# Altium PCB Carte_GR_2017.PcbDoc (part 2 of 2)
Units mil, origin at the board's own origin, x right, y up, seen from the top; angles counter-clockwise.
Board outline 6500 x 3500 mil, 2 copper layers (Top Layer, Bottom Layer); 159 components, 151 nets, 592 pads, 138 vias.
Unrouted connection lines stored in the file: 4.
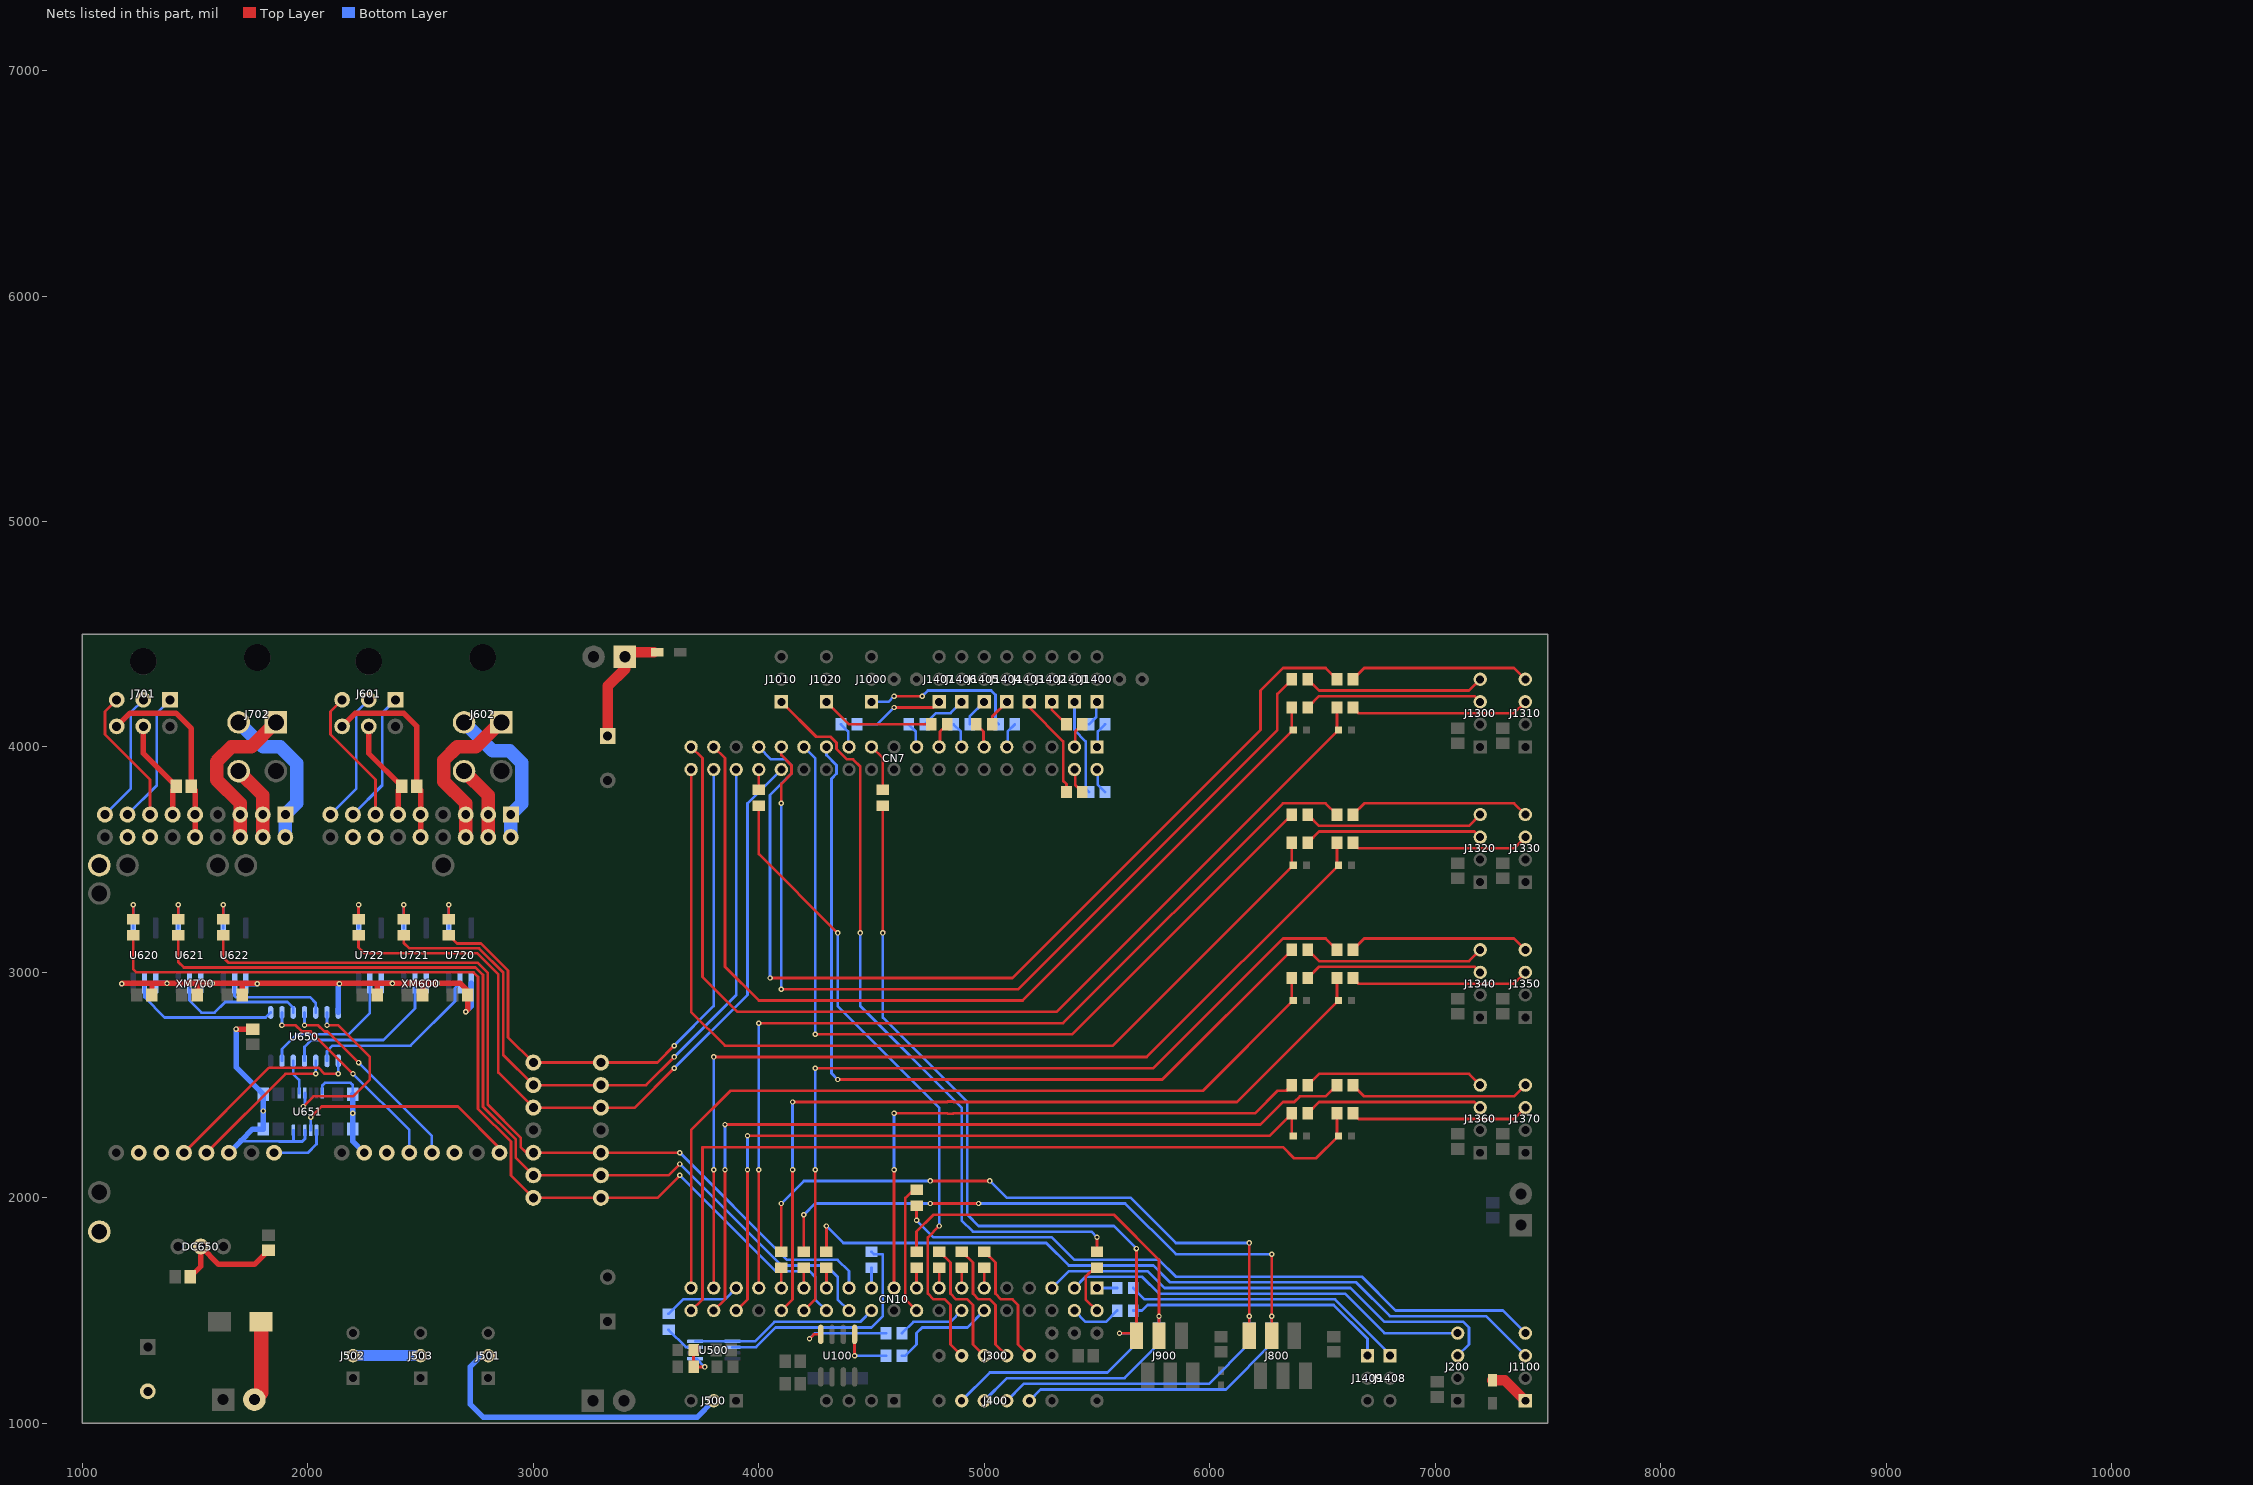
[diagram p2: the nets of this part, all layers, seen from the top]

## Via types
v1: diameter 24, hole 12, Top Layer to Bottom Layer, 131 vias
v2: diameter 140, hole 120, Top Layer to Bottom Layer, 6 vias
v3: diameter 50, hole 28, Top Layer to Bottom Layer, 1 vias

## Nets (pads, with @x,y where several pads share a name; then routed paths per layer and width w, separated by ;. In a path a pad name is that pad's centre, name@x,y a point inside that pad or via, vN(x,y) a via of type N, cw(c..) or ccw(c..) an arc to the next point about the centre after c; other vN are vias at no path point) (continued)
GND_PWR: B1.2 C1.2 C600.1 C620.1 C621.1 C622.1 C650.1 C651.1 C652.1 C653.1 C654.1 C655.1 C656.1 C700.1 C720.1 C721.1 C722.1 DC650.2 J601.6 J701.6 pad.12 pad.13 U620.4 U621.4 U622.4 U650.7 U651.4 U651.6 U651.12 U720.4 U721.4 U722.4 XM600.9 XM600.10 XM600.14 XM600.16 XM600.20 XM600.21 XM600.24 XM700.9 XM700.10 XM700.14 XM700.16 XM700.20 XM700.21 XM700.24 Z1.1 | length 6678.7
  Top Layer w24: J701.6@1151.89,4090.94 1210.94,4150 1415,4150 1483.46,4081.54 C700.1@1483.46,3825 1500,3808.46 XM700.9@1500,3700 XM700.10@1500,3600 ; v1(1175,2950) 1176.03,2951.03 1305,2951.03 ; C620.1@1308.46,2900 1308.46,2947.56 1305,2951.03 ; C650.1@1478.46,1650 1525,1696.54 DC650.2@1525,1784.13 1604.13,1705 1763.46,1705 C651.1@1825,1766.54 ; C621.1@1508.46,2900 1508.46,2949.49 1510,2951.03 ; v1(1681.54,2748.46) C656.1@1755,2748.46 ; C622.1@1708.46,2900 1708.46,2949.49 1710,2951.03 ; J601.6@2151.89,4090.94 2210.94,4150 2425,4150 2483.46,4091.54 C600.1@2483.46,3825 2500,3808.46 XM600.9@2500,3700 XM600.10@2500,3600 ; C722.1@2308.46,2900 2308.46,2949.49 ; C721.1@2510,2901.54 2510,2951.03 ; v1(2700,2825) 2708.46,2833.46 C720.1@2708.46,2900 2708.46,2918.59 2676.03,2951.03 v1(2575,2951.03) 2510,2951.03 ; 1305,2951.03 v1(1375,2951.03) 1510,2951.03 ; 1510,2951.03 v1(1575,2951.03) 1710,2951.03 ; 1710,2951.03 v1(2375,2951.03) 2510,2951.03
  Top Layer w64: B1.2@1762.8,1105 1792.52,1134.72 Z1.1@1792.52,1450
  Bottom Layer w12: 1702.5,2252.5 1704.07,2250.93 1871.1,2250.93 1872.03,2250 1935,2250 ; U651.6@1935.91,2299.65 1935.91,2250.91 1935,2250 ; U651.4@1987.09,2299.65 1987.09,2262.09 1975,2250 1935,2250 ; U651.12@2063.86,2465 2063.86,2498.86 2075,2510 2190,2510 2198.46,2501.54 C655.1@2198.46,2460
  Bottom Layer w24: U620.4@1325,2952.95 1326.93,2951.03 v1(1375,2951.03) ; U621.4@1525,2952.95 1526.93,2951.03 v1(1575,2951.03) ; XM700.24@1650,2200 1702.5,2252.5 1755,2305 C653.1@1801.54,2305 v1(1801.54,2385) C654.1@1801.54,2460 1681.54,2580 v1(1681.54,2748.46) ; U622.4@1725,2952.95 1727.95,2950 v1(1775,2950) ; U650.7@2135,2822.28 2135,2945 v1(2140,2950) ; C655.1@2198.46,2460 C652.1@2198.46,2305 2198.46,2251.54 XM600.20@2250,2200 ; U722.4@2326.93,2951.03 v1(2375,2951.03) ; U721.4@2525,2952.95 2526.93,2951.03 v1(2575,2951.03) ; v1(2700,2825) 2725,2850 U720.4@2725,2952.95
  other v1: 2198.46,2375
M1_H1: J601.5 XM600.13 | length 613.4
  Top Layer w12: J601.5@2151.89,4209.06 2100,4157.17 2100,4055 2300,3855 XM600.13@2300,3700
M1_H2: J601.1 XM600.15 | length 587
  Bottom Layer w12: XM600.15@2200,3700 2330,3830 2330,4150.94 J601.1@2388.11,4209.06
M1_H3: J601.3 XM600.17 | length 579.5
  Bottom Layer w12: XM600.17@2100,3700 2215,3815 2215,4154.06 J601.3@2270,4209.06
M1_VCC_H: C600.2 J601.4 XM600.11 | length 458.5
  Top Layer w24: J601.4@2270,4090.94 2270,3971.54 C600.2@2416.54,3825 2400,3808.46 XM600.11@2400,3700
M1_W1: J602.3 XM600.1 XM600.2 | length 678.5
  Bottom Layer w60: J602.3@2692.76,4109.06 2819.79,3982.02 2895.18,3982.02 2947.61,3929.59 2947.61,3747.61 XM600.1@2900,3700 XM600.2@2900,3600
M1_W2: J602.4 XM600.3 XM600.4 | length 336.9
  Top Layer w60: J602.4@2692.76,3892.52 2800,3785.28 XM600.3@2800,3700 XM600.4@2800,3600
M1_W3: J602.1 XM600.5 XM600.6 | length 705.7
  Top Layer w60: XM600.6@2700,3600 XM600.5@2700,3700 2700,3749.87 2603.26,3846.61 2603.26,3941.34 2661.92,4000 2745,4000 2854.06,4109.06 J602.1@2858.11,4109.06
M2_H1: J701.5 XM700.13 | length 613.4
  Top Layer w12: J701.5@1151.89,4209.06 1100,4157.17 1100,4055 1300,3855 XM700.13@1300,3700
M2_H2: J701.1 XM700.15 | length 587
  Bottom Layer w12: XM700.15@1200,3700 1330,3830 1330,4150.94 J701.1@1388.11,4209.06
M2_H3: J701.3 XM700.17 | length 579.5
  Bottom Layer w12: XM700.17@1100,3700 1215,3815 1215,4154.06 J701.3@1270,4209.06
M2_VCC_H: C700.2 J701.4 XM700.11 | length 458.5
  Top Layer w24: J701.4@1270,4090.94 1270,3971.54 C700.2@1416.54,3825 1400,3808.46 XM700.11@1400,3700
M2_W1: J702.3 XM700.1 XM700.2 | length 680.5
  Bottom Layer w60: J702.3@1692.76,4109.06 1801.81,4000 1877.2,4000 1950,3927.2 1950,3750 XM700.1@1900,3700 XM700.2@1900,3600
M2_W2: J702.4 XM700.3 XM700.4 | length 336.9
  Top Layer w60: J702.4@1692.76,3892.52 1800,3785.28 XM700.3@1800,3700 XM700.4@1800,3600
M2_W3: J702.1 XM700.5 XM700.6 | length 713.7
  Top Layer w60: XM700.6@1700,3600 XM700.5@1700,3700 1700,3749.87 1595,3854.87 1595,3935 1660,4000 1749.06,4000 J702.1@1858.11,4109.06
MAXON1_DIR: U650.4 XM600.23 | length 900.2
  Top Layer w12: v1(1985,2765) 2046.11,2765 2073.61,2737.5 2087.5,2737.5 v1(2225,2600)
  Bottom Layer w12: v1(1985,2765) U650.4@1985,2822.28 ; v1(2225,2600) 2550,2275 XM600.23@2550,2200
MAXON1_DIR_INV: U621.5 U650.3 | length 611.5
  Bottom Layer w12: U621.5@1475,2952.95 1475,2875 1528.53,2821.47 1586.39,2821.47 1633.63,2868.71 1910,2868.71 1935,2843.71 U650.3@1935,2822.28
MAXON1_EN: U650.2 XM600.22 | length 914.9
  Top Layer w12: v1(1885,2765) 1946.11,2765 1973.61,2737.5 2012.5,2737.5 v1(2200,2550)
  Bottom Layer w12: v1(1885,2765) U650.2@1885,2822.28 ; v1(2200,2550) 2450,2300 XM600.22@2450,2200
MAXON1_EN_INV: U620.5 U650.1 | length 669.5
  Bottom Layer w12: U620.5@1275,2952.95 1275,2890 1365.03,2799.97 1812.69,2799.97 U650.1@1835,2822.28
MAXON1_PWM: U650.6 U651.9 | length 802.9
  Top Layer w12: v1(1980,2405) 2025,2450 2200,2450 2275,2525 2275,2625 2135,2765 v1(2085,2765)
  Bottom Layer w12: v1@1987.09,2412.09 U651.9@1987.09,2465 ; v1(2085,2765) U650.6@2085,2822.28
MAXON1_PWM_INV: U622.5 U650.5 | length 473.1
  Bottom Layer w12: U622.5@1675,2952.95 1675,2895 1679.79,2890.21 2009.79,2890.21 2035,2865 U650.5@2035,2822.28
MAXON1_V_CMD: U651.3 XM600.26 | length 1011.6
  Top Layer w12: v1(2012.68,2357.68) 2060,2405 2665,2405 2850,2220 XM600.26@2850,2200
  Bottom Layer w12: U651.3@2012.68,2299.65 v1(2012.68,2357.68)
MAXON2_DIR: U650.10 XM700.23 | length 687.7
  Top Layer w12: XM700.23@1550,2200 1900,2550 v1(2035,2550)
  Bottom Layer w12: v1(2035,2550) U650.10@2035,2607.72
MAXON2_DIR_INV: U650.11 U721.5 | length 735.7
  Bottom Layer w12: U650.11@1985,2607.72 1985,2670 2015,2700 2335,2700 2475,2840 U721.5@2475,2952.95
MAXON2_EN: U650.8 XM700.22 | length 910.5
  Top Layer w12: XM700.22@1450,2200 1827.5,2577.5 2046.39,2577.5 2073.89,2550 v1(2135,2550)
  Bottom Layer w12: v1(2135,2550) U650.8@2135,2607.72
MAXON2_EN_INV: U650.9 U720.5 | length 792
  Bottom Layer w12: U650.9@2085,2607.72 2085,2650 2110,2675 2455.43,2675 2652.5,2872.07 2652.5,2930.45 U720.5@2675,2952.95
MAXON2_PWM: U650.12 U651.8 | length 153.7
  Bottom Layer w12: U650.12@1935,2607.72 1935,2550 1961.5,2523.5 U651.8@1961.5,2465
MAXON2_PWM_INV: U650.13 U722.5 | length 641.5
  Bottom Layer w12: U650.13@1885,2607.72 1885,2660 1950,2725 2180,2725 2275,2820 U722.5@2275,2952.95
MAXON2_V_CMD: U651.2 XM700.26 | length 265.5
  Bottom Layer w12: XM700.26@1850,2200 2000,2200 2038.27,2238.27 U651.2@2038.27,2299.65
NetB2_1: B2.1 C2.1 FB2.2 | length 519.2
  Top Layer w48: C2.1@3330,4048.43 3330,4270 3406,4346 B2.1@3406,4400 3426,4420 FB2.2@3533.82,4420
NetFB1100_2: FB1100.2 J1100.1 | length 182.8
  Top Layer w48: FB1100.2@7255,1191.18 7308.82,1191.18 J1100.1@7400,1100
NetJ300_2: J300.2 R303.1 | length 2883.1
  Top Layer w12: R303.1@4000,3739.57 4000,3525 v1(4350,3175) ; v1(4800,1875) 4750,1825 4750,1575 4775,1550 4825,1550 4850,1525 4850,1350 J300.2@4900,1300
  Bottom Layer w12: v1(4350,3175) 4350,2850 4800,2400 v1(4800,1875)
NetJ300_3: J300.3 R302.1 | length 573.9
  Top Layer w12: R302.1@4800,1760.43 4802.24,1760.43 4850,1712.67 4850,1575 4875,1550 4925,1550 4950,1525 4950,1350 J300.3@5000,1300
NetJ300_4: J300.4 R301.1 | length 573.9
  Top Layer w12: R301.1@4900,1760.43 4902.24,1760.43 4950,1712.67 4950,1575 4975,1550 5025,1550 5050,1525 5050,1350 J300.4@5100,1300
NetJ300_5: J300.5 R300.1 | length 573.9
  Top Layer w12: R300.1@5000,1760.43 5002.24,1760.43 5050,1712.67 5050,1575 5075,1550 5125,1550 5150,1525 5150,1350 J300.5@5200,1300
NetJ400_2: J400.2 R400.1 | length 1179.9
  Bottom Layer w12: J400.2@5200,1100 5250,1150 6071.85,1150 R400.1@6275,1353.15
NetJ400_3: J400.3 R401.1 | length 1179.9
  Bottom Layer w12: J400.3@5100,1100 5175,1175 5996.85,1175 R401.1@6175,1353.15
NetJ400_4: J400.4 R402.1 | length 879.9
  Bottom Layer w12: J400.4@5000,1100 5100,1200 5621.85,1200 R402.1@5775,1353.15
NetJ400_5: J400.5 R403.1 | length 879.9
  Bottom Layer w12: J400.5@4900,1100 5025,1225 5546.85,1225 R403.1@5675,1353.15
NetJ1000_1: J1000.1 R1000.2 | length 715.6
  Top Layer w12: v1(4600,4225) v1(4725,4225)
  Bottom Layer w12: J1000.1@4500,4200 4575,4200 v1(4600,4225) ; v1(4725,4225) 4750,4250 5030.98,4250 5050,4230.98 5050,4114.57 R1000.2@5064.57,4100
NetJ1010_1: J1010.1 R1010.2 | length 3380.3
  Top Layer w12: J1010.1@4100,4200 4254.97,4045.03 4318.65,4045.03 4345.03,4018.65 4345.03,3991.29 4391.29,3945.03 4418.65,3945.03 4450,3913.68 v1(4450,3175) ; R1010.2@5500,1760.43 v1(5500,1825)
  Bottom Layer w12: v1(4450,3175) 4450,2850 4900,2400 4900,1900 4950,1850 5475,1850 v1(5500,1825)
NetJ1020_1: J1020.1 R1020.2 | length 506
  Top Layer w12: J1020.1@4300,4200 4400,4100 R1020.2@4764.57,4100
NetJ1100_3: J1100.3 R1100.1 | length 3452.7
  Top Layer w12: R1100.1@4300,1760.43 v1(4300,1875)
  Bottom Layer w12: v1(4300,1875) 4375,1800 5275,1800 5375,1700 5750,1700 5825,1625 6650,1625 6800,1475 7225,1475 J1100.3@7400,1300
NetJ1100_4: J1100.4 R1101.1 | length 2971.7
  Top Layer w12: v1(4700,1900) R1101.1@4700,1964.57
  Bottom Layer w12: v1(4700,1900) 4775,1825 5300,1825 5400,1725 5775,1725 5850,1650 6675,1650 6825,1500 7300,1500 J1100.4@7400,1400
NetJ1300_3: J1300.3 R1300.1 | length 795.6
  Top Layer w12: R1300.1@6435.43,4175 6485.43,4225 7175,4225 J1300.3@7200,4200
NetJ1300_4: J1300.4 R1301.1 | length 806
  Top Layer w12: R1301.1@6435.43,4300 6485.43,4250 7150,4250 J1300.4@7200,4300
NetJ1310_3: J1310.3 R1310.1 | length 795.6
  Top Layer w12: R1310.1@6635.43,4175 6660.43,4150 7350,4150 J1310.3@7400,4200
NetJ1310_4: J1310.4 R1311.1 | length 806
  Top Layer w12: R1311.1@6635.43,4300 6685.43,4350 7350,4350 J1310.4@7400,4300
NetJ1320_3: J1320.3 R1320.1 | length 795.6
  Top Layer w12: R1320.1@6435.43,3575 6485.43,3625 7175,3625 J1320.3@7200,3600
NetJ1320_4: J1320.4 R1321.1 | length 806
  Top Layer w12: R1321.1@6435.43,3700 6485.43,3650 7150,3650 J1320.4@7200,3700
NetJ1330_3: J1330.3 R1330.1 | length 795.6
  Top Layer w12: R1330.1@6635.43,3575 6660.43,3550 7350,3550 J1330.3@7400,3600
NetJ1330_4: J1330.4 R1331.1 | length 806
  Top Layer w12: R1331.1@6635.43,3700 6685.43,3750 7350,3750 J1330.4@7400,3700
NetJ1340_3: J1340.3 R1340.1 | length 795.6
  Top Layer w12: R1340.1@6435.43,2975 6485.43,3025 7175,3025 J1340.3@7200,3000
NetJ1340_4: J1340.4 R1341.1 | length 806
  Top Layer w12: R1341.1@6435.43,3100 6485.43,3050 7150,3050 J1340.4@7200,3100
NetJ1350_3: J1350.3 R1350.1 | length 795.6
  Top Layer w12: R1350.1@6635.43,2975 6660.43,2950 7350,2950 J1350.3@7400,3000
NetJ1350_4: J1350.4 R1351.1 | length 806
  Top Layer w12: R1351.1@6635.43,3100 6685.43,3150 7350,3150 J1350.4@7400,3100
NetJ1360_3: J1360.3 R1360.1 | length 795.6
  Top Layer w12: R1360.1@6435.43,2375 6485.43,2425 7175,2425 J1360.3@7200,2400
NetJ1360_4: J1360.4 R1361.1 | length 806
  Top Layer w12: R1361.1@6435.43,2500 6485.43,2550 7150,2550 J1360.4@7200,2500
NetJ1370_3: J1370.3 R1370.1 | length 795.6
  Top Layer w12: R1370.1@6635.43,2375 6660.43,2350 7350,2350 J1370.3@7400,2400
NetJ1370_4: J1370.4 R1371.1 | length 806
  Top Layer w12: R1371.1@6635.43,2500 6685.43,2450 7350,2450 J1370.4@7400,2500
NetJ1400_1: J1400.1 R1400.2 | length 116.8
  Bottom Layer w12: R1400.2@5464.57,4100 5496.31,4131.74 5496.31,4200 J1400.1@5500,4200
NetJ1401_1: J1401.1 R1401.2 | length 426.7
  Bottom Layer w12: J1401.1@5400,4200 5400,4075 5450,4025 5450,3814.57 R1401.2@5464.57,3800
NetJ1402_1: J1402.1 R1402.2 | length 126.7
  Top Layer w12: J1402.1@5300,4200 5300,4164.57 R1402.2@5364.57,4100
NetJ1403_1: J1403.1 R1403.2 | length 468.2
  Top Layer w12: J1403.1@5200,4200 5200,4175 5350,4025 5350,3850 5364.57,3835.43 R1403.2@5364.57,3800
NetJ1404_1: J1404.1 R1404.2 | length 126.7
  Top Layer w12: R1404.2@5035.43,4100 5035.43,4135.43 J1404.1@5100,4200
NetJ1405_1: J1405.1 R1405.2 | length 126.7
  Bottom Layer w12: R1405.2@4935.43,4100 4935.43,4135.43 J1405.1@5000,4200
NetJ1406_1: J1406.1 R1406.2 | length 206
  Bottom Layer w12: R1406.2@4735.43,4100 4785.43,4150 4850,4150 J1406.1@4900,4200
NetJ1407_1: J1407.1 R1407.2 | length 406
  Top Layer w12: v1(4600,4175) 4775,4175 J1407.1@4800,4200
  Bottom Layer w12: R1407.2@4435.43,4100 4525,4100 v1(4600,4175)
NetJ1408_1: J1408.1 R1408.2 | length 1267
  Bottom Layer w12: R1408.2@5660.43,1600 5710.43,1550 6555.41,1550 6800,1305.41 J1408.1@6800,1300
NetJ1409_1: J1409.1 R1409.2 | length 1187.1
  Bottom Layer w12: R1409.2@5660.43,1500 5700,1500 5725,1525 6550,1525 6700,1375 J1409.1@6700,1300
NetR103_1: R103.1 U100.1 | length 234.1
  Top Layer w12: v1(4425,1300) U100.1@4425,1394.49
  Bottom Layer w12: v1(4425,1300) R103.1@4564.57,1300
NetR104_1: R104.1 U100.4 | length 408
  Top Layer w12: v1(4225,1375) 4244.49,1394.49 U100.4@4275,1394.49
  Bottom Layer w12: v1(4225,1375) 4250,1400 R104.1@4564.57,1400
NetR500_1: R500.1 R501.2 U500.1 | length 181.5
  Top Layer w12: R500.1@3710.87,1325 R501.2@3710.87,1250 v1(3760,1250)
  Bottom Layer w12: U500.1@3717.76,1286.61 3723.39,1286.61 v1(3760,1250)
NetR503_1: R503.1 U500.6 | length 1053
  Bottom Layer w12: U500.6@3883.11,1337.8 3987.8,1337.8 4075,1425 4500,1425 4550,1475 4550,1750 4510.43,1750 R503.1@4500,1760.43
NetR504_1: R504.1 U500.3 | length 149.6
  Bottom Layer w12: R504.1@3600,1414.57 3676.77,1337.8 U500.3@3717.76,1337.8
NetR620_2: R620.2 U620.1 | length 167.5
  Top Layer w12: R620.2@1225,3235.43 v1(1225,3300)
  Bottom Layer w12: U620.1@1225,3197.05 v1(1225,3300)
NetR621_2: R621.2 U621.1 | length 167.5
  Top Layer w12: R621.2@1425,3235.43 v1(1425,3300)
  Bottom Layer w12: U621.1@1425,3197.05 v1(1425,3300)
NetR622_2: R622.2 U622.1 | length 167.5
  Top Layer w12: R622.2@1625,3235.43 v1(1625,3300)
  Bottom Layer w12: U622.1@1625,3197.05 v1(1625,3300)
NetR720_2: R720.2 U720.1 | length 167.5
  Top Layer w12: R720.2@2625,3235.43 v1(2625,3300)
  Bottom Layer w12: U720.1@2625,3197.05 v1(2625,3300)
NetR721_2: R721.2 U721.1 | length 167.5
  Top Layer w12: R721.2@2425,3235.43 v1(2425,3300)
  Bottom Layer w12: U721.1@2425,3197.05 v1(2425,3300)
NetR722_2: R722.2 U722.1 | length 167.5
  Top Layer w12: R722.2@2225,3235.43 v1(2225,3300)
  Bottom Layer w12: U722.1@2225,3197.05 v1(2225,3300)
QEI1_CH_A: J800.4 R400.2 R800.1 | length 2765.9
  Top Layer w12: R800.1@4200,1760.43 v1(4200,1925) ; v1(4760,1975) v1(4975,1975) ; J800.4@6275,1388.58 v1(6275,1475) v1(6275,1750)
  Bottom Layer w12: v1(4200,1925) 4250,1975 v1(4760,1975) ; v1(4975,1975) 5625,1975 5850,1750 v1(6275,1750) ; R400.2@6275,1424.02 v1(6275,1475)
QEI1_CH_B: J800.6 R401.2 R801.1 | length 2907.3
  Top Layer w12: R801.1@4100,1760.43 v1(4100,1975) ; v1(4760,2075) v1(5025,2075) ; J800.6@6175,1388.58 v1(6175,1475) v1(6175,1800)
  Bottom Layer w12: v1(4100,1975) 4200,2075 v1(4760,2075) ; v1(5025,2075) 5100,2000 5650,2000 5850,1800 v1(6175,1800) ; R401.2@6175,1424.02 v1(6175,1475)
QEI2_CH_A: J900.4 R402.2 R900.1 | length 1665.9
  Top Layer w12: R900.1@4700,1760.43 4700,1850 4775,1925 5575,1925 5775,1725 v1(5775,1475) J900.4@5775,1388.58
  Bottom Layer w12: R402.2@5775,1424.02 v1(5775,1475)
QEI2_CH_B: J900.6 R403.2 R901.1 | length 3337.3
  Top Layer w12: v1(4550,3175) 4555,3180 4550,3185 R901.1@4550,3739.57 ; v1(5600,1400) 5663.58,1400 J900.6@5675,1388.58 v1(5675,1775)
  Bottom Layer w12: v1(4550,3175) 4550,2800 4925,2425 4925,1925 4975,1875 5575,1875 v1(5675,1775) ; v1(5600,1400) 5650.98,1400 R403.2@5675,1424.02
STM32_PA1_MAXON2_PWM: CN7.30 pad.14@3000,2400 pad.14@3300,2400 R722.1 | length 3597.7
  Top Layer w12: R722.1@2225,3164.57 2225,3110 2250,3085 2750,3085 2845,2990 2845,2555 pad.14@3000,2400 pad.14@3300,2400 3450,2400 v1(3625,2575)
  Bottom Layer w12: v1(3625,2575) 3950,2900 3950,3750 CN7.30@4100,3900
STM32_PA4_SPI1_NSS: CN7.32 R303.2 | length 89.6
  Top Layer w12: R303.2@4000,3810.43 CN7.32@4000,3900
STM32_PA5_SPI1_SCK: CN10.11 R300.2 | length 89.6
  Top Layer w12: CN10.11@5000,1600 R300.2@5000,1689.57
STM32_PA6_SPI1_MISO: CN10.13 R301.2 | length 89.6
  Top Layer w12: CN10.13@4900,1600 R301.2@4900,1689.57
STM32_PA7_SPI1_MOSI: CN10.15 R302.2 | length 89.6
  Top Layer w12: CN10.15@4800,1600 R302.2@4800,1689.57
STM32_PA8_MAXON1_PWM: CN10.23 pad.14@3000,2200 pad.14@3300,2200 R622.1 | length 3891.9
  Top Layer w12: R622.1@1625,3164.57 1625,3065 1646.97,3043.03 2752.78,3043.03 2798,2997.81 2798,2412.81 2943.93,2266.88 2943.93,2226.07 2970,2200 pad.14@3000,2200 pad.14@3300,2200 v1(3650,2200)
  Bottom Layer w12: v1(3650,2200) 4125,1725 4350,1725 4400,1675 CN10.23@4400,1600
STM32_PA9_MAX485_TX: CN10.21 R503.2 | length 89.6
  Bottom Layer w12: CN10.21@4500,1600 R503.2@4500,1689.57
STM32_PA10_MAX485_RX: CN10.33 R504.2 | length 347.5
  Bottom Layer w12: R504.2@3600,1485.43 3664.57,1550 3850,1550 CN10.33@3900,1600
STM32_PA11_CAN1_RX: CN10.14 R104.2 | length 306
  Bottom Layer w12: R104.2@4635.43,1400 4685.43,1450 4850,1450 CN10.14@4900,1500
STM32_PA12_CAN1_TX: CN10.12 R103.2 | length 476.7
  Bottom Layer w12: R103.2@4635.43,1300 4650,1300 4700,1350 4700,1400 4725,1425 4925,1425 CN10.12@5000,1500
STM32_PA13_GPIO: CN7.13 R1405.1 | length 114.7
  Bottom Layer w12: R1405.1@4864.57,4100 4896.31,4068.26 4896.31,4003.69 CN7.13@4900,4000
STM32_PA14_SERVO12_PWM: CN7.15 R1020.1 | length 114.7
  Top Layer w12: CN7.15@4800,4000 4803.69,4003.69 4803.69,4068.26 R1020.1@4835.43,4100
STM32_PA15_GPIO: CN7.17 R1406.1 | length 114.7
  Bottom Layer w12: R1406.1@4664.57,4100 4696.31,4068.26 4696.31,4003.69 CN7.17@4700,4000
STM32_PB0_MAXON2_DIR: CN7.34 pad.14@3000,2500 pad.14@3300,2500 R721.1 | length 3149.4
  Top Layer w12: R721.1@2425,3164.57 2425,3131.5 2450,3106.5 2758.91,3106.5 2866.5,2998.91 2866.5,2633.5 pad.14@3000,2500 pad.14@3300,2500 3500,2500 v1(3625,2625)
  Bottom Layer w12: v1(3625,2625) 3900,2900 CN7.34@3900,3900
STM32_PB1_MAXON1_DIR: CN10.24 pad.14@3000,2100 pad.14@3300,2100 R621.1 | length 4223.4
  Top Layer w12: R621.1@1425,3164.57 1425,3046.53 1450,3021.53 2743.88,3021.53 2776.5,2988.91 2776.5,2403.91 2922.43,2257.97 2922.43,2177.57 pad.14@3000,2100 pad.14@3300,2100 3600,2100 v1(3650,2150)
  Bottom Layer w12: v1(3650,2150) 4100,1700 4300,1700 4350,1650 4350,1550 CN10.24@4400,1500
STM32_PB2_MAX485_DIR: CN10.22 U500.4 U500.5 | length 838.8
  Bottom Layer w12: U500.4@3717.76,1363.39 U500.5@3883.11,1363.39 3982.98,1363.39 4069.59,1450 4450,1450 CN10.22@4500,1500
STM32_PB4_QEI1_CH_A: CN10.27 R800.2 | length 89.6
  Top Layer w12: CN10.27@4200,1600 R800.2@4200,1689.57
STM32_PB5_QEI1_CH_B: CN10.29 R801.2 | length 89.6
  Top Layer w12: CN10.29@4100,1600 R801.2@4100,1689.57
STM32_PB6_QEI2_CH_A: CN10.17 R900.2 | length 89.6
  Top Layer w12: CN10.17@4700,1600 R900.2@4700,1689.57
STM32_PB7_QEI2_CH_B: CN7.21 R901.2 | length 210.3
  Top Layer w12: CN7.21@4500,4000 4550,3950 R901.2@4550,3810.43
STM32_PB8_I2C1_SCL: CN10.3 J200.4 | length 1824.3
  Bottom Layer w12: CN10.3@5400,1600 5450,1650 5700,1650 5775,1575 6600,1575 6775,1400 J200.4@7100,1400
STM32_PB9_I2C1_SDA: CN10.5 J200.3 | length 2130.3
  Bottom Layer w12: CN10.5@5300,1600 5375,1675 5725,1675 5800,1600 6625,1600 6775,1450 7125,1450 7150,1425 7150,1350 J200.3@7100,1300
STM32_PB10_RPI_TX: CN10.25 R1100.2 | length 89.6
  Top Layer w12: CN10.25@4300,1600 R1100.2@4300,1689.57
STM32_PB11_RPI_RX: CN10.18 R1101.2 | length 585.4
  Top Layer w12: CN10.18@4700,1500 4650,1550 4650,2000 4685.43,2035.43 R1101.2@4700,2035.43
STM32_PB15_MAXON1_EN: CN10.26 pad.14@3000,2000 pad.14@3300,2000 R620.1 | length 4424.3
  Top Layer w12: R620.1@1225,3164.57 1225,3015 1239.97,3000.03 2734.97,3000.03 2755,2980 2755,2394.59 2900.53,2249.07 2900.93,2249.07 2900.93,2099.07 pad.14@3000,2000 pad.14@3300,2000 3550,2000 v1(3650,2100)
  Bottom Layer w12: v1(3650,2100) 4075,1675 4225,1675 4250,1650 4250,1550 CN10.26@4300,1500
STM32_PC1_MAXON2_EN: CN7.36 pad.14@3000,2600 pad.14@3300,2600 R720.1 | length 2735.7
  Top Layer w12: R720.1@2625,3164.57 2661.57,3128 2767.81,3128 2888,3007.81 2888,2712 pad.14@3000,2600 pad.14@3300,2600 3550,2600 v1(3625,2675)
  Bottom Layer w12: v1(3625,2675) 3800,2850 CN7.36@3800,3900
STM32_PC6_GPIO: CN10.4 R1409.1 | length 231
  Bottom Layer w12: CN10.4@5400,1500 5450,1450 5539.57,1450 R1409.1@5589.57,1500
STM32_PC8_SERVO11_PWM: CN10.2 R1010.1 | length 237.1
  Top Layer w12: CN10.2@5500,1500 5450,1550 5450,1650 5489.57,1689.57 R1010.1@5500,1689.57
STM32_PC9_GPIO: CN10.1 R1408.1 | length 89.6
  Bottom Layer w12: CN10.1@5500,1600 R1408.1@5589.57,1600
STM32_PC10_GPIO: CN7.1 R1400.1 | length 114.7
  Bottom Layer w12: CN7.1@5500,4000 5503.69,4003.69 5503.69,4068.26 R1400.1@5535.43,4100
STM32_PC11_GPIO: CN7.2 R1401.1 | length 114.7
  Bottom Layer w12: CN7.2@5500,3900 5503.69,3896.31 5503.69,3831.74 R1401.1@5535.43,3800
STM32_PC12_GPIO: CN7.3 R1402.1 | length 114.7
  Top Layer w12: CN7.3@5400,4000 5403.69,4003.69 5403.69,4068.26 R1402.1@5435.43,4100
STM32_PC13_GPIO: CN7.23 R1407.1 | length 114.7
  Bottom Layer w12: R1407.1@4364.57,4100 4396.31,4068.26 4396.31,4003.69 CN7.23@4400,4000
STM32_PD2_GPIO: CN7.4 R1403.1 | length 114.7
  Top Layer w12: CN7.4@5400,3900 5403.69,3896.31 5403.69,3831.74 R1403.1@5435.43,3800
STM32_PF6_SERVO10_PWM: CN7.9 R1000.1 | length 114.7
  Bottom Layer w12: CN7.9@5100,4000 5103.69,4003.69 5103.69,4068.26 R1000.1@5135.43,4100
STM32_PF7_GPIO: CN7.11 R1404.1 | length 114.7
  Top Layer w12: R1404.1@4964.57,4100 4996.31,4068.26 4996.31,4003.69 CN7.11@5000,4000
STM32_SHARP0_ADC: C1301.2 CN7.35 R1300.2 | length 4177.8
  Top Layer w12: CN7.35@3800,4000 3850,3950 3850,3025 4000,2875 5170.47,2875 C1301.2@6370.47,4075 6364.57,4080.91 R1300.2@6364.57,4175
STM32_SHARP0_GPIO: CN7.29 R1301.2 | length 4040.4
  Top Layer w12: v1(4100,2925) 5150,2925 6300,4075 6300,4235.43 R1301.2@6364.57,4300 ; v1(4100,3750) 4100,3836.32 4145.03,3881.35 4145.03,3918.65 4100,3963.68 CN7.29@4100,4000
  Bottom Layer w12: v1(4100,2925) v1(4100,3750)
STM32_SHARP1_ADC: C1311.2 CN7.37 R1310.2 | length 4545.6
  Top Layer w12: CN7.37@3700,4000 3750,3950 3750,2980 3905,2825 5320.47,2825 C1311.2@6570.47,4075 6564.57,4080.91 R1310.2@6564.57,4175
STM32_SHARP1_GPIO: CN7.31 R1311.2 | length 4369.1
  Top Layer w12: v1(4050,2975) 5125,2975 6225,4075 6225,4250 6325,4350 6514.57,4350 R1311.2@6564.57,4300
  Bottom Layer w12: CN7.31@4000,4000 4054.97,3945.03 4118.65,3945.03 4145.03,3918.65 4145.03,3881.35 4050,3786.32 v1(4050,2975)
STM32_SHARP2_ADC: C1321.2 CN7.38 R1320.2 | length 4241.4
  Top Layer w12: CN7.38@3700,3900 3700,2825 3850,2675 5570.47,2675 C1321.2@6370.47,3475 6364.57,3480.91 R1320.2@6364.57,3575
STM32_SHARP2_GPIO: CN7.27 R1321.2 | length 3814.1
  Top Layer w12: v1(4250,2725) 5389.57,2725 R1321.2@6364.57,3700
  Bottom Layer w12: CN7.27@4200,4000 4250,3950 v1(4250,2725)
STM32_SHARP3_ADC: C1331.2 CN10.35 R1330.2 | length 4250
  Top Layer w12: CN10.35@3800,1600 v1(3800,2125) ; v1(3800,2625) 5720.47,2625 C1331.2@6570.47,3475 6564.57,3480.91 R1330.2@6564.57,3575
  Bottom Layer w12: v1(3800,2125) v1(3800,2625)
STM32_SHARP3_GPIO: CN10.31 R1331.2 | length 4164.1
  Top Layer w12: CN10.31@4000,1600 v1(4000,2125) ; v1(4000,2775) 5350,2775 6325,3750 6514.57,3750 R1331.2@6564.57,3700
  Bottom Layer w12: v1(4000,2125) v1(4000,2775)
STM32_SHARP4_ADC: C1341.2 CN10.37 R1340.2 | length 3711.1
  Top Layer w12: CN10.37@3700,1600 3700,2300 3875,2475 5970.47,2475 C1341.2@6370.47,2875 6364.57,2880.91 R1340.2@6364.57,2975
STM32_SHARP4_GPIO: CN7.25 R1341.2 | length 3767.1
  Top Layer w12: v1(4350,2525) 5789.57,2525 R1341.2@6364.57,3100
  Bottom Layer w12: CN7.25@4300,4000 4300,3963.68 4345.03,3918.65 4345.03,3881.35 4322.5,3858.82 4322.5,2552.5 v1(4350,2525)
STM32_SHARP5_ADC: C1351.2 CN10.30 R1350.2 | length 3657.1
  Top Layer w12: CN10.30@4100,1500 4150,1550 v1(4150,2125) ; v1(4150,2425) 4836.11,2425 4838.61,2427.5 4861.39,2427.5 4863.89,2425 6120.47,2425 C1351.2@6570.47,2875 6564.57,2880.91 R1350.2@6564.57,2975
  Bottom Layer w12: v1(4150,2125) v1(4150,2425)
STM32_SHARP5_GPIO: CN10.28 R1351.2 | length 3669.2
  Top Layer w12: CN10.28@4200,1500 4250,1550 v1(4250,2125) ; v1(4250,2575) 5750,2575 6325,3150 6514.57,3150 R1351.2@6564.57,3100
  Bottom Layer w12: v1(4250,2125) v1(4250,2575)
STM32_SHARP6_ADC: C1361.2 CN10.34 R1360.2 | length 3354.1
  Top Layer w12: CN10.34@3900,1500 3950,1550 v1(3950,2125) ; v1(3950,2275) 6264.57,2275 R1360.2@6364.57,2375 6364.57,2280.91 C1361.2@6370.47,2275
  Bottom Layer w12: v1(3950,2125) v1(3950,2275)
STM32_SHARP6_GPIO: CN10.19 R1361.2 | length 2593.4
  Top Layer w12: CN10.19@4600,1600 v1(4600,2125) ; v1(4600,2375) 4836.11,2375 4838.61,2372.5 4861.39,2372.5 4863.89,2375 6200,2375 6300,2475 6339.57,2475 R1361.2@6364.57,2500
  Bottom Layer w12: v1(4600,2125) v1(4600,2375)
STM32_SHARP7_ADC: C1371.2 CN10.38 R1370.2 | length 3730.8
  Top Layer w12: CN10.38@3700,1500 3750,1550 3750,2225 6325,2225 6375,2175 6470.47,2175 C1371.2@6570.47,2275 6564.57,2280.91 R1370.2@6564.57,2375
STM32_SHARP7_GPIO: CN10.36 R1371.2 | length 3632.8
  Top Layer w12: CN10.36@3800,1500 3850,1550 v1(3850,2125) ; v1(3850,2325) 6225,2325 6325,2425 6375,2425 6400,2450 6514.57,2450 R1371.2@6564.57,2500
  Bottom Layer w12: v1(3850,2125) v1(3850,2325)
VCC_DYN_0: J500.2 J501.2 | length 1400.4
  Bottom Layer w24: J501.2@2800,1300 2770,1300 2720,1250 2720,1085 2778.5,1026.5 3726.5,1026.5 J500.2@3800,1100
VCC_DYN_1: J502.2 J503.2 | length 300
  Bottom Layer w48: J502.2@2200,1300 J503.2@2500,1300
pads on no net: CN7.6 CN7.7 CN7.10 CN7.12 CN7.14 CN7.16 CN7.18 CN7.24 CN7.26 CN7.28 CN7.33 CN10.7 CN10.16 J400.1 J400.6 J601.0 J601.2 J602.0 J602.2 J701.0 J701.2 J702.0 J702.2 J800.5 J900.5 U100.5 XM600.12 XM600.18 XM600.19 XM600.25 XM700.12 XM700.18 XM700.19 XM700.25
copper on no net: | length 225
  Top Layer w24: 10435,6820 10435,7045
  other v2: 1100,1600 6900,1600 3000,2750 3300,2750 1100,3900 6900,3900

## Polygon pours and split planes (outlines as drawn)
GND on Bottom Layer "BOTTOM GND" (solid, pour order 4): 3225,4475 7475,4475 7475,1025 3225,1025 3225,4475
GND_PWR on Bottom Layer "BOTTOM POWER GND" (solid, pour order 0): 1000,4500 3100,4500 3100,1000 1000,1000
GND on Top Layer "TOP GND" (solid, pour order 6): 3225,4475 7475,4475 7475,1025 3225,1025 3225,4475
GND_PWR on Top Layer "TOP POWER GND" (solid, pour order 2): 1015,4485 3100,4485 3100,1015 1015,1015 1015,4485

## Keep-outs
Keep-Out Layer:
  the board outline again, w10

## Other copper
Top Layer:
  pour cut-out: 2930,2670 3375,2670 3380,2665 3380,1920 2925,1920 2920,1925
  pour cut-out: 4455,1450 4245,1450 4240,1445 4240,1145 4450,1145 4455,1150
  pour cut-out: 2000,1000 2005,1005 2005,1600 3110,1600 3110,1000
Bottom Layer:
  pour cut-out: 2930,2670 3375,2670 3380,2665 3380,1920 2925,1920 2920,1925
  pour cut-out: 1915,2500 2085,2500 2085,2265 1910,2265
  pour cut-out: 1805,2868.71 1806.29,2870 2165,2870 2165,2570 1805,2570
  pour cut-out: 3676.13,1377.45 3920.39,1377.45 3919.26,1376.32 3919.26,1258.39 3676.61,1258.39 3675,1260
  pour cut-out: 2000,1000 2005,1005 2005,1600 3110,1600 3110,1000

## Silkscreen, mask and mechanical layers (free items; w line width, h text height)
Mechanical 1:
  lines w10: 3100,990 3100,4510 ; 3200,990 3200,4510

## Text inside footprints (layer, text, board x,y; h text height)
C1: Top Overlay "+" at 1319.53,1448.66 h59.06 r90
C2: Top Overlay "+" at 3359.53,4158.66 h59.06 r90
C3: Top Overlay "+" at 3300.47,1341.34 h59.06 r270
CN7: Top Overlay "38" at 3628,3928 h50 r180; Top Overlay "37" at 3630,4110 h50 r180; Top Overlay "2" at 5600,3920 h50 r180; Top Overlay "1" at 5590,4020 h50 r180
CN10: Top Overlay "38" at 3628,1528 h50 r180; Top Overlay "37" at 3630,1710 h50 r180; Top Overlay "2" at 5600,1520 h50 r180; Top Overlay "1" at 5590,1620 h50 r180
DC650: Top Overlay "Vi" at 1458.07,1831.38 h60 r90; Top Overlay "Vo" at 1654.92,1831.38 h60 r90
J601: Top Overlay "1" at 2450,4220 h39.37 r180; Top Overlay "6" at 2092.83,4130.31 h39.37 r180
J602: Top Overlay "6" at 2641.57,3896.46 h39.37 r180; Top Overlay "1" at 2920,4120 h39.37 r180
J701: Top Overlay "1" at 1450,4220 h39.37 r180; Top Overlay "6" at 1092.83,4130.31 h39.37 r180
J702: Top Overlay "6" at 1641.57,3896.46 h39.37 r180; Top Overlay "1" at 1920,4120 h39.37 r180
J800: Top Overlay "6" at 6075,1365 h39.37; Top Overlay "1" at 6500,1165 h39.37
J900: Top Overlay "6" at 5575,1365 h39.37; Top Overlay "1" at 6000,1165 h39.37